# EAGLE board expansionBoardNoRoute (EAGLE 7.7.0)

Size 70.01 x 50.04 mm. Coordinates in mm from the lower left corner, seen from the top.
Outline: 0,0 0.01,50.04 20.01,50.04 20.01,30.04 50.01,30.04 50.01,50.04 70.01,50.04 70.01,0.04 0,0
Copper layers (1*16): Top 0.035mm / dielectric 1.5mm / Bottom 0.035mm
Design rules "default": minimum track width 10mil, minimum drill 24mil, track to track 8mil, track to pad 8mil, pad to pad 8mil, via to via 8mil, smd to smd 8mil, copper to edge 40mil, drill to drill 8mil, minimum pad ring 10mil, minimum via ring 8mil, stop-mask expansion 4mil, vias tented up to drill 0mil, thermal gap 10mil
Net classes: 0 default: width 0.203 mm; 1 power: width 0.254 mm

## Footprints (pad centres in the part's own frame; a part is rotated, then mirrored left to right if it is on the bottom)
0402-CAP = smd 0.7 x 0.9: 1 -0.65,0; 2 0.65,0
2X19 = drill 1.016 octagon: 1 -22.86,-1.27; 2 -22.86,1.27; 3 -20.32,-1.27; 4 -20.32,1.27; 5 -17.78,-1.27; 6 -17.78,1.27; 7 -15.24,-1.27; 8 -15.24,1.27; 9 -12.7,-1.27; 10 -12.7,1.27; 11 -10.16,-1.27; 12 -10.16,1.27; 13 -7.62,-1.27; 14 -7.62,1.27; 15 -5.08,-1.27; 16 -5.08,1.27; 17 -2.54,-1.27; 18 -2.54,1.27; 19 0,-1.27; 20 0,1.27; 21 2.54,-1.27; 22 2.54,1.27; 23 5.08,-1.27; 24 5.08,1.27; 25 7.62,-1.27; 26 7.62,1.27; 27 10.16,-1.27; 28 10.16,1.27; 29 12.7,-1.27; 30 12.7,1.27; 31 15.24,-1.27; 32 15.24,1.27; 33 17.78,-1.27; 34 17.78,1.27; 35 20.32,-1.27; 36 20.32,1.27; 37 22.86,-1.27; 38 22.86,1.27
LED5MMRGB = drill 0.6 pad 0.813 offset: 1 -2.009,0.033; 2 -0.785,-0.048; 3 0.689,0.033; 4 2.013,0.002
LED-0603 = smd 0.8 x 0.8: A 0,-0.75; C 0,0.75
0402-RES = smd 0.7 x 0.9: 1 -0.65,0; 2 0.65,0
0603-ARC = smd 0.5 x 0.65: 1 -1.2,-0.625; 2 -0.4,-0.625; 3 0.4,-0.625; 4 1.2,-0.625; 5 1.2,0.625; 6 0.4,0.625; 7 -0.4,0.625; 8 -1.2,0.625
B3F-10XX = drill 1.016 long: 1 -3.251,2.261; 2 3.251,2.261; 3 -3.251,-2.261; 4 3.251,-2.261
MA03-1 = drill 1.016 long: 1 -2.54,0; 2 0,0; 3 2.54,0
EDG-08 = drill 0.813 long: 1 -8.89,-3.81; 2 -6.35,-3.81; 3 -3.81,-3.81; 4 -1.27,-3.81; 5 1.27,-3.81; 6 3.81,-3.81; 7 6.35,-3.81; 8 8.89,-3.81; 9 8.89,3.81; 10 6.35,3.81; 11 3.81,3.81; 12 1.27,3.81; 13 -1.27,3.81; 14 -3.81,3.81; 15 -6.35,3.81; 16 -8.89,3.81
TRIM-3386 = drill 0.9 pad 1.778: 1 -2.54,-2.857; 2 0,-2.857; 3 2.54,-2.857
SOIC127P600X175-8N = smd 1.981 x 0.559: 1 -2.362,1.905; 2 -2.362,0.635; 3 -2.362,-0.635; 4 -2.362,-1.905; 5 2.362,-1.905; 6 2.362,-0.635; 7 2.362,0.635; 8 2.362,1.905
TSSOP28 = smd 0.305 x 0.991: 1 -4.225,-2.918; 2 -3.575,-2.918; 3 -2.925,-2.918; 4 -2.275,-2.918; 5 -1.625,-2.918; 6 -0.975,-2.918; 7 -0.325,-2.918; 8 0.325,-2.918; 9 0.975,-2.918; 10 1.625,-2.918; 11 2.275,-2.918; 12 2.925,-2.918; 13 3.575,-2.918; 14 4.225,-2.918; 15 4.225,2.918; 16 3.575,2.918; 17 2.925,2.918; 18 2.275,2.918; 19 1.625,2.918; 20 0.975,2.918; 21 0.325,2.918; 22 -0.325,2.918; 23 -0.975,2.918; 24 -1.625,2.918; 25 -2.275,2.918; 26 -2.925,2.918; 27 -3.575,2.918; 28 -4.225,2.918

## Placement (x,y rotation side)
C3  0.1uF  [0402-CAP]  10.17,19.09 0 bottom
CN7  [2X19]  4.46,26.07 90 top
CN10  [2X19]  65.42,26.07 90 top
LED1  RGBLED_CA-5MM  [LED5MMRGB]  11.06,27.14 0 top
LED3  Red  [LED-0603]  58.43,24.17 0 top
LED4  Red  [LED-0603]  55.89,24.17 0 top
LED5  Green  [LED-0603]  53.35,24.17 0 top
LED6  Green  [LED-0603]  50.81,24.17 0 top
LED7  RGBLED_CA-5MM  [LED5MMRGB]  10.37,45.16 0 top
LED8  RGBLED_CA-5MM  [LED5MMRGB]  16.5,45.28 0 top
LED9  RGBLED_CA-5MM  [LED5MMRGB]  16.53,37.28 0 top
LED10  RGBLED_CA-5MM  [LED5MMRGB]  10.34,37.28 0 top
R3  470  [0402-RES]  58.43,20.36 270 bottom
R4  470  [0402-RES]  55.89,20.36 90 bottom
R5  470  [0402-RES]  53.35,20.36 270 bottom
R6  470  [0402-RES]  50.81,20.36 270 bottom
R11  10K  [0402-RES]  12.71,15.28 180 bottom
R12  470  [0402-RES]  12.71,12.74 0 bottom
R13  10K  [0402-RES]  22.87,6.39 0 bottom
R14  470  [0402-RES]  22.87,3.85 180 bottom
R19  10K  [0402-RES]  12.71,3.85 0 bottom
R20  470  [0402-RES]  12.71,6.39 0 bottom
R21  10K  [0402-RES]  22.87,15.28 0 bottom
R22  470  [0402-RES]  22.87,12.74 0 bottom
RN1  [0603-ARC]  10.17,34.33 0 bottom
RN2  [0603-ARC]  13.98,34.33 0 bottom
RN3  [0603-ARC]  17.79,34.33 0 bottom
RN4  [0603-ARC]  11.89,23.06 0 bottom
RN5  [0603-ARC]  32.28,16.99 270 bottom
RN6  [0603-ARC]  43,16.1 90 bottom
S1  [B3F-10XX]  12.71,14.01 0 top
S2  [B3F-10XX]  22.87,5.12 0 top
S3  [B3F-10XX]  12.71,5.12 0 top
S4  [B3F-10XX]  22.87,14.01 0 top
SERVO  [MA03-1]  28.91,26.62 0 top
SW1  [EDG-08]  56.31,38.07 90 top
TM1  [TRIM-3386]  57.17,5.76 0 top
U2  25LC256-I/SNG  [SOIC127P600X175-8N]  43.19,24.17 0 bottom
U3  [TSSOP28]  19.07,23.69 180 bottom

## Library data of the parts
C3 LED3-LED6 R3-R6 R11-R14 R19-R22 = SparkFun
CN7 CN10 = pinhead
LED1 LED7-LED10 TM1 U3 = NucleoShield
RN1-RN6 = resistor-dil; OC_FARNELL: unknown; OC_NEWARK: unknown
S1-S4 = switch-omron; MPN: B3F-1000; OC_FARNELL: 176432; OC_NEWARK: 36M3542
SERVO = con-lstb; OC_FARNELL: unknown; OC_NEWARK: unknown
SW1 = special
U2 = Microchip_By_element14_Batch_1; DESCRIPTION: EEPROM; MPN: 25LC256-I/SNG; OC_FARNELL: -; OC_NEWARK: 92C7460; PACKAGE: SOIC-8; SUPPLIER: Microchip

## Nets
3V3: CN7.16
5V: CN7.18
A1: CN7.30
A2: CN7.32
A3: CN7.34
A4: CN7.36
A6: CN7.38
AGND: CN10.32
AVDD: CN10.7
BOOT0: CN7.7
E5V: CN7.6
EEPROM_CLK: CN10.11 U2.6
EEPROM_CS: CN10.17 U2.1
EEPROM_MISO: CN10.13 U2.2
EEPROM_MOSI: CN10.15 U2.5
GND [power]: C3.1 CN7.8 CN7.19 CN7.20 CN7.22 CN10.9 CN10.20 LED3.C LED4.C R19.1 R21.1 RN6.1 RN6.2 RN6.3 RN6.4 S1.3 S1.4 S2.3 S2.4 SERVO.3 SW1.1 SW1.2 SW1.3 SW1.4 TM1.1 U2.4 U3.1 U3.2 U3.3 U3.4 U3.5 U3.14 U3.23 U3.24
IOREF: CN7.12
LED3: CN7.1 R3.2
LED4: CN7.3 R4.2
LED5: CN7.13 LED5.C
LED6: CN7.15 LED6.C
N$1: LED1.1 RN4.8
N$2: LED1.3 RN4.7
N$3: LED3.A R3.1
N$4: LED4.A R4.1
N$5: RN1.1 U3.6
N$6: RN1.2 U3.7
N$7: LED5.A R5.1
N$8: LED6.A R6.1
N$9: RN1.3 U3.8
N$10: RN1.4 U3.9
N$13: RN2.1 U3.10
N$14: RN2.2 U3.11
N$17: RN2.3 U3.12
N$18: RN2.4 U3.13
N$19: RN3.1 U3.15
N$24: R13.1 R14.2 S2.1
N$25: R11.1 R12.2 S1.1
N$26: R14.1
N$27: R12.1
N$28: RN3.2 U3.16
N$29: RN3.3 U3.17
N$30: RN3.4 U3.18
N$31: LED9.1 RN1.8
N$32: R19.2 R20.2 S3.1
N$33: R20.1
N$34: R21.2 R22.2 S4.1
N$35: R22.1
N$36: LED9.3 RN1.7
N$37: LED9.4 RN1.6
N$38: LED8.1 RN1.5
N$39: LED8.3 RN2.8
N$41: LED8.4 RN2.7
N$42: LED10.1 RN2.6
N$43: LED10.3 RN2.5
N$44: LED10.4 RN3.8
N$45: LED7.1 RN3.7
N$46: LED7.3 LED7.4 RN3.6
N$47: LED1.4 RN4.6
N$48: RN4.1 U3.19
N$49: RN4.2 U3.20
N$50: RN4.3 U3.21
N$51: RN4.4 U3.22
N$52: RN4.5 SERVO.1
NC: CN7.9 CN7.10 CN7.11 CN7.26 CN10.10 CN10.36 CN10.38
PA_2: CN10.35 RN6.5 SW1.9
PA_3: CN10.37
PA_8: CN10.23 RN5.6 SW1.14
PA_9: CN10.21 RN5.7 SW1.15
PA_10: CN10.33 RN6.6 SW1.10
PA_11: CN10.14
PA_15: CN7.17
PB_1: CN10.24
PB_2: CN10.22
PB_3: CN10.31 RN6.7 SW1.11
PB_4: CN10.27 RN6.8 SW1.12
PB_5: CN10.29
PB_7: CN7.21
PB_10: CN10.25 RN5.5 SW1.13
PB_11: CN10.18
PB_12: CN10.16
PB_13: CN10.30
PB_14: CN10.28
PB_15: CN10.26
PC_2: CN7.35
PC_3: CN7.37
PC_4: CN10.34
PC_7: CN10.19 RN5.8 SW1.16
PC_9: CN10.1
PC_11: CN7.2
PC_13: CN7.23
PC_14: CN7.25
PC_15: CN7.27
PD_2: CN7.4
PF_0: CN7.29
PF_1: CN7.31
POT: CN7.28 TM1.2
PUSH_BUTT1: CN10.2
PUSH_BUTT2: CN10.4
PUSH_BUTT3: CN10.6
PUSH_BUTT4: CN10.12
RESET: CN7.14
SCL: CN10.3 U3.26
SDA: CN10.5 U3.27
U5V: CN10.8
VBAT: CN7.33
VCC: C3.2 LED1.2 LED7.2 LED8.2 LED9.2 LED10.2 R5.2 R6.2 R11.2 R13.2 RN5.1 RN5.2 RN5.3 RN5.4 S3.3 S3.4 S4.3 S4.4 SERVO.2 SW1.5 SW1.6 SW1.7 SW1.8 TM1.3 U2.3 U2.7 U2.8 U3.28
VDD: CN7.5
VIN: CN7.24

## Tracks (layer width: path | path; a pad name or v marks a point on that pad's centre or on a via)
EEPROM_CLK  (1 unrouted)
EEPROM_CS  (1 unrouted)
EEPROM_MISO  (1 unrouted)
EEPROM_MOSI  (1 unrouted)
GND  (33 unrouted)
LED3  (1 unrouted)
LED4  (1 unrouted)
LED5  (1 unrouted)
LED6  (1 unrouted)
N$1  (1 unrouted)
N$2  (1 unrouted)
N$3  (1 unrouted)
N$4  (1 unrouted)
N$5  (1 unrouted)
N$6  (1 unrouted)
N$7  (1 unrouted)
N$8  (1 unrouted)
N$9  (1 unrouted)
N$10  (1 unrouted)
N$13  (1 unrouted)
N$14  (1 unrouted)
N$17  (1 unrouted)
N$18  (1 unrouted)
N$19  (1 unrouted)
N$24  (2 unrouted)
N$25  (2 unrouted)
N$28  (1 unrouted)
N$29  (1 unrouted)
N$30  (1 unrouted)
N$31  (1 unrouted)
N$32  (2 unrouted)
N$34  (2 unrouted)
N$36  (1 unrouted)
N$37  (1 unrouted)
N$38  (1 unrouted)
N$39  (1 unrouted)
N$41  (1 unrouted)
N$42  (1 unrouted)
N$43  (1 unrouted)
N$44  (1 unrouted)
N$45  (1 unrouted)
N$46  (2 unrouted)
N$47  (1 unrouted)
N$48  (1 unrouted)
N$49  (1 unrouted)
N$50  (1 unrouted)
N$51  (1 unrouted)
N$52  (1 unrouted)
NC  (6 unrouted)
PA_2  (2 unrouted)
PA_8  (2 unrouted)
PA_9  (2 unrouted)
PA_10  (2 unrouted)
PB_3  (2 unrouted)
PB_4  (2 unrouted)
PB_10  (2 unrouted)
PC_7  (2 unrouted)
POT  (1 unrouted)
SCL  (1 unrouted)
SDA  (1 unrouted)
VCC  (27 unrouted)